# Allegro board BD9109FVMEVK-101_BRD_REV00_2013-11-22.brd
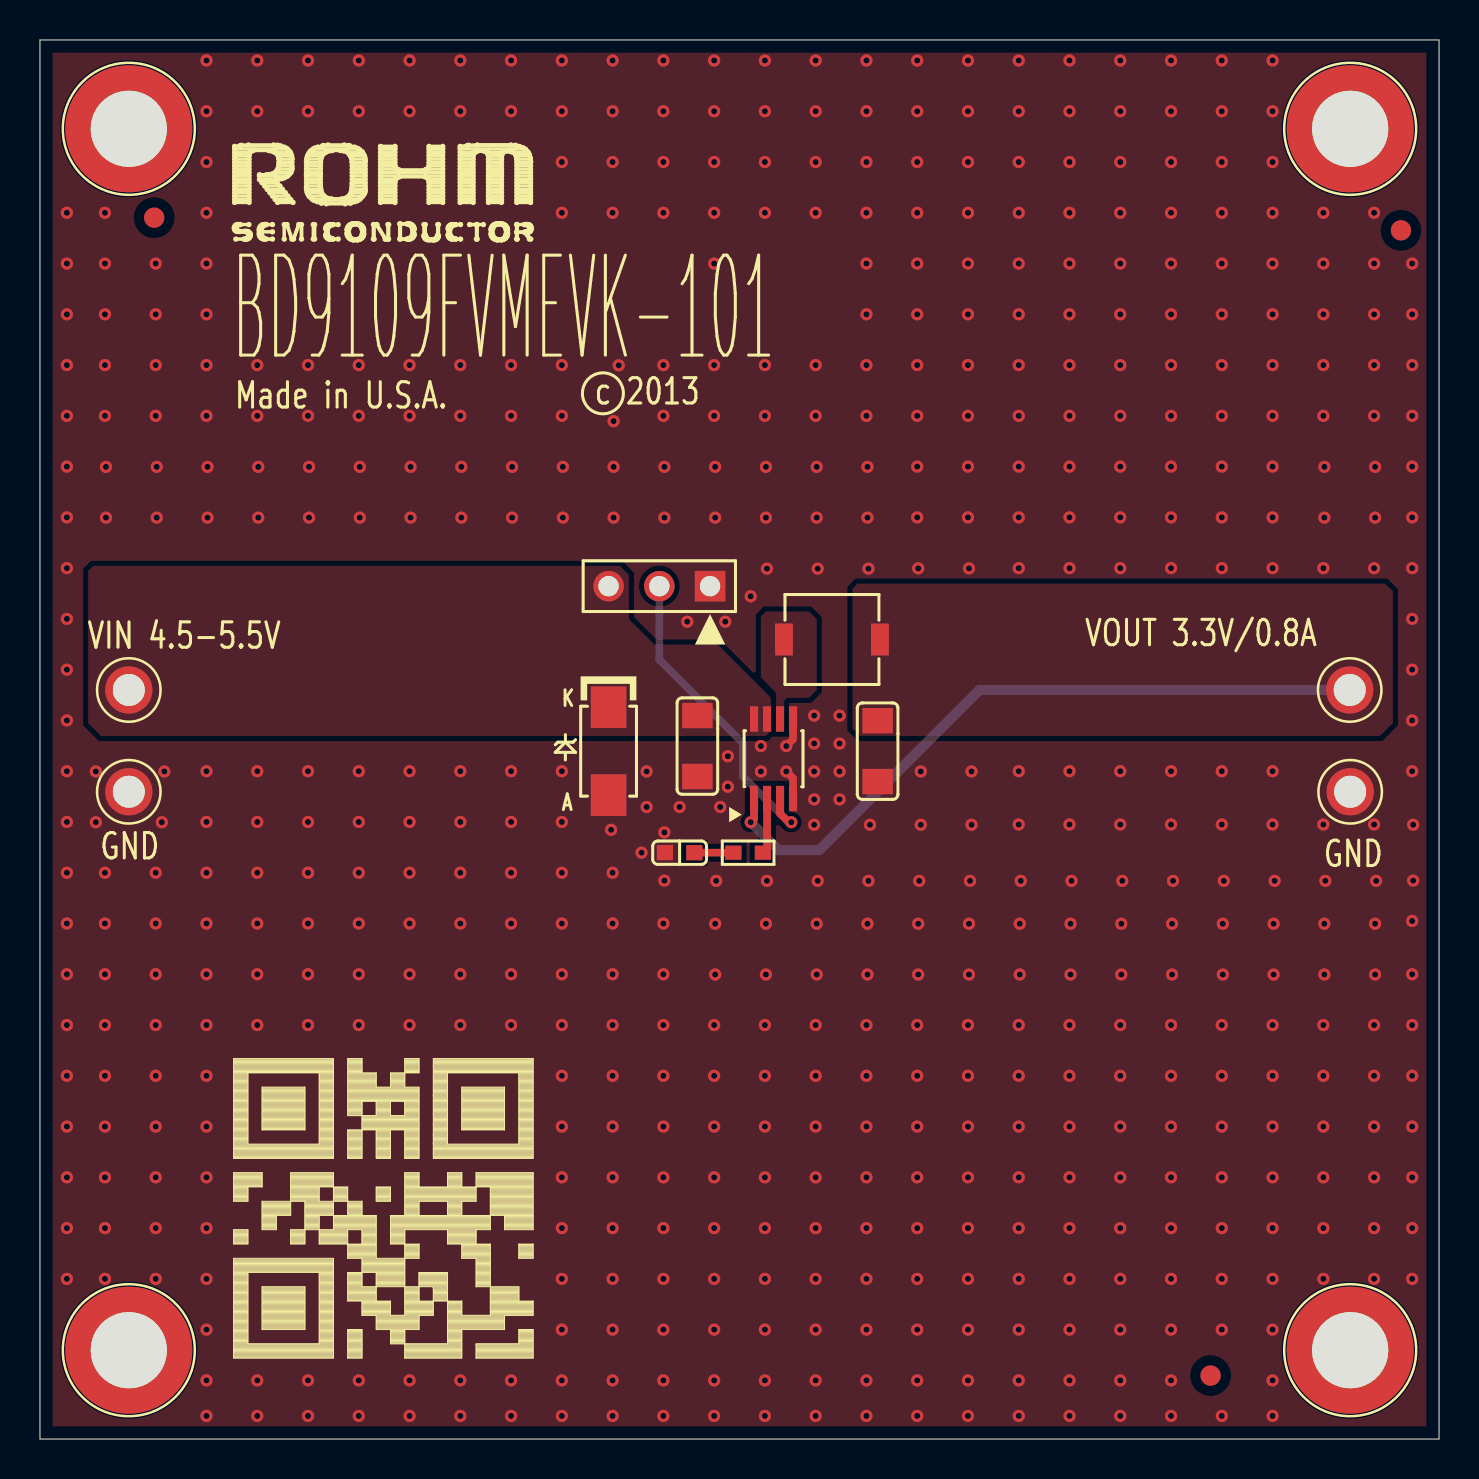
[diagram p0: board, top side]
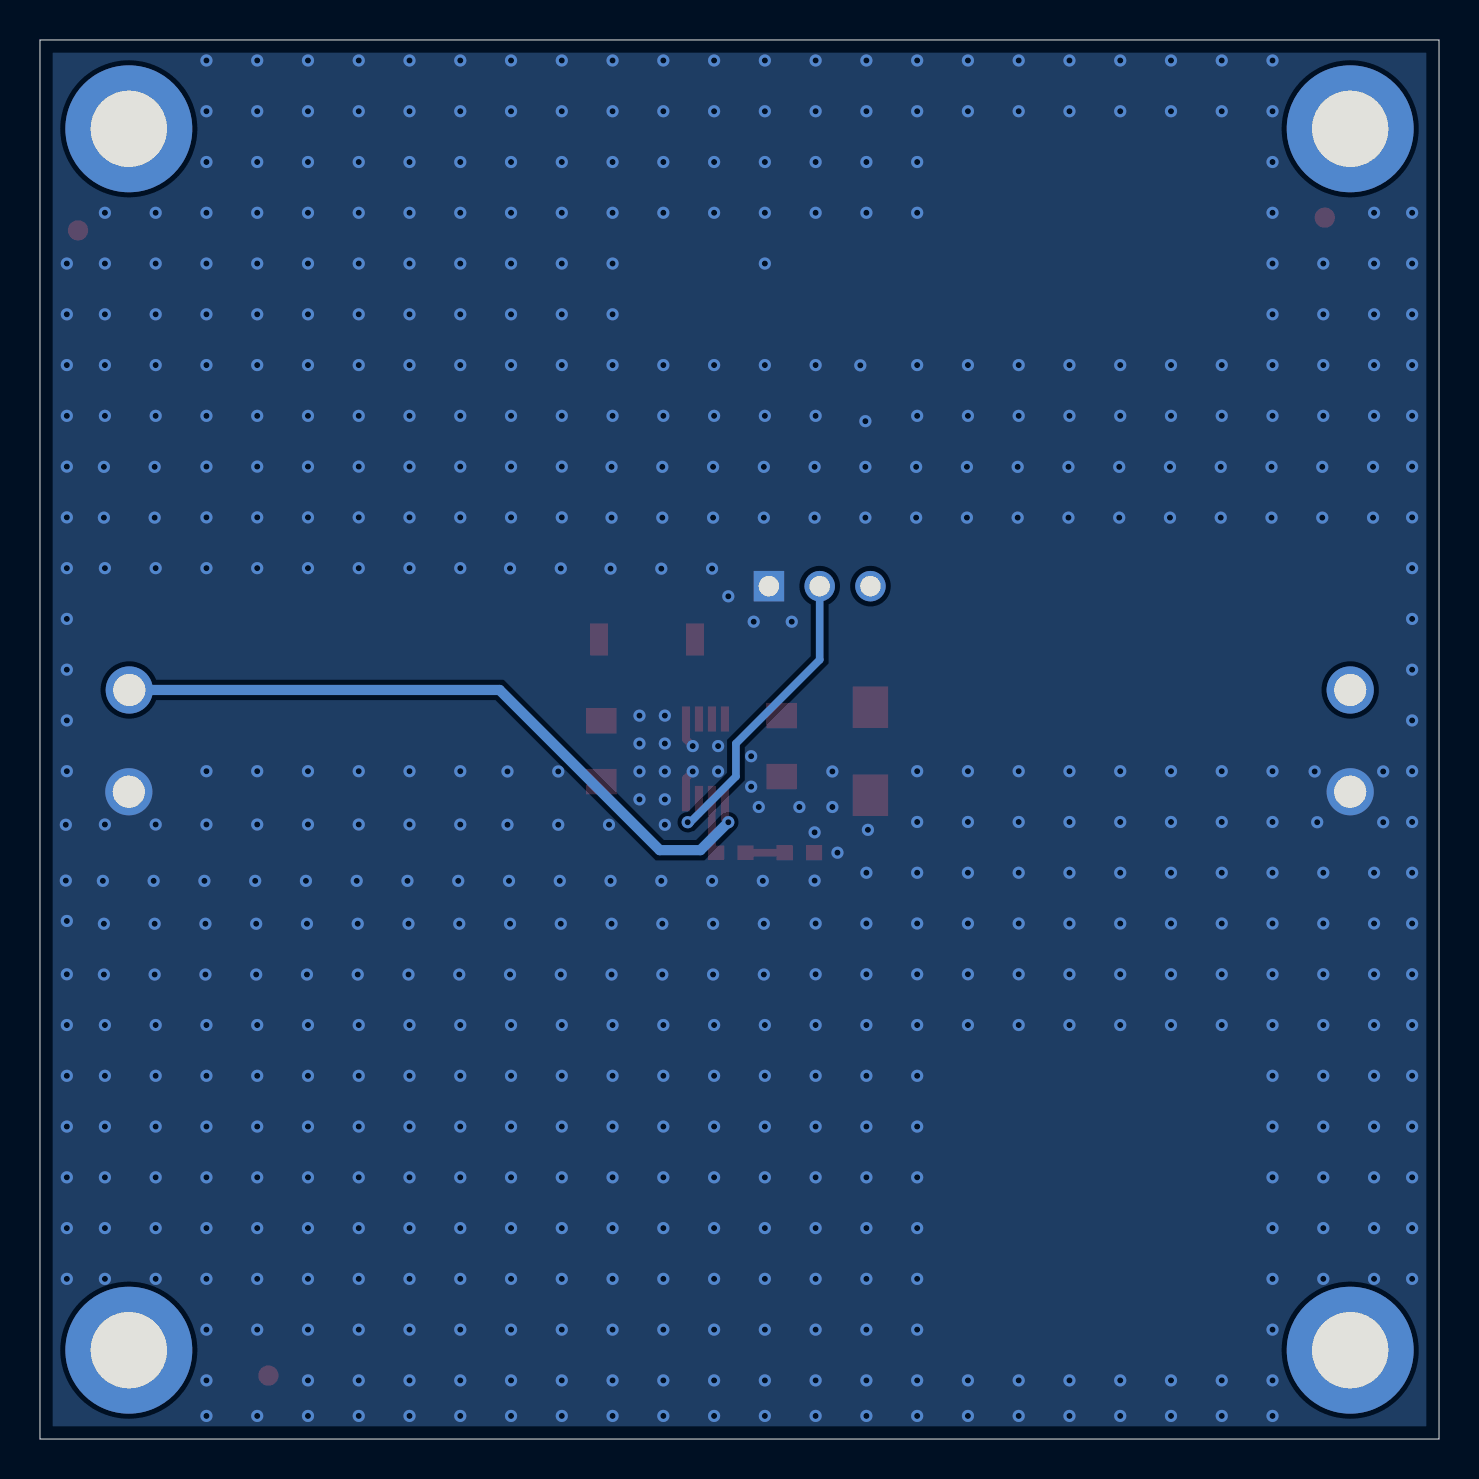
[diagram p1: board, bottom side, seen from below]

Outline 70 x 70 mm; copper layers: TOP, BOTTOM. Coordinates in mm from the lower left corner of the outline.
Outline path: 0,70 0,0 70,0 70,70 0,70

## Placement (name value [footprint] x y rotation side)
C1  10uF  [C1206]  41.91 34.42 270 top
C2  10uF  [C1206]  32.89 34.67 270 top
C3  330pF  [C0603]  32 29.34 0 top
D1  P4SMA6.8A  [DO-214AC]  28.45 34.42 270 top
J1  87224-3  [HDR_THVT_1X3_100]  33.53 42.67 180 top
L1  4.7uH  [SMT_4P5X4P7]  39.62 40.01 0 top
NOREF  -  []  0 0 0 top
NOREF#2  -  []  0 70 0 top
NOREF#3  -  []  70 0 0 top
NOREF#4  -  []  65.55 4.45 0 top
NOREF#5  -  [unnamed#2]  65.55 4.45 0 top
NOREF#6  -  [unnamed#2]  65.55 65.55 0 top
NOREF#7  -  [unnamed#3]  5.71 61.11 0 top
NOREF#8  -  []  4.45 4.45 0 top
NOREF#9  -  [unnamed#2]  4.45 65.55 0 top
NOREF#10  -  []  4.45 65.55 0 top
NOREF#11  -  []  -53.9 -127.88 0 top
NOREF#12  -  [unnamed#2]  4.45 4.45 0 top
NOREF#13  -  []  70 0 90 top
NOREF#14  -  [unnamed#3]  58.57 3.18 0 top
NOREF#15  -  []  4.45 4.45 0 top
NOREF#16  -  [unnamed#3]  68.09 60.47 0 top
NOREF#17  -  []  -12.15 -35.18 0 top
NOREF#18  -  []  0 70 0 top
NOREF#19  -  []  0 0 0 top
R1  30K  [R0603]  35.43 29.34 0 top
TP1  TP_63Mil_TH  [TP_TH]  65.53 37.48 270 top
TP2  TP_63Mil_TH  [TP_TH]  65.55 32.39 270 top
TP3  TP_63Mil_TH  [TP_TH]  4.45 37.48 0 top
TP4  TP_63Mil_TH  [TP_TH]  4.45 32.39 0 top
U1  BD9109FVM-TR  [MSOP8]  36.7 34.04 0 top

## Library data of the parts
C1 C2 = CAP_VER_CER_1210_10UF_16V_10%
C3 = CAP_VER_CER_0603_330PF_50V_10%
D1 = DIODE_TVS_5.8V_400W
J1 = CONN PCB 3x1_.100"
L1 = IND_SMT_4P5X4P7
R1 = R_VER_0805_30K_1/8W_1%
TP1-TP4 = TP_50Mil_TH
U1 = IC_BD9109FVM_MSOP8

## Footprints (pads in the part's own frame, mm; a bottom-side part is the same pattern mirrored in y, then rotated)
C0603
  rect 0.813x0.762 smd: 1(0.737,0) 2(-0.737,0)
C1206
  rect 1.27x1.524 smd: 1(-1.524,0) 2(1.524,0)
DO-214AC
  rect 2.083x1.778 smd: 1(-2.2,0) 2(2.2,0)
HDR_THVT_1X3_100
  rect 1.524x1.524 hole 1.016: 1(0,0)
  round 1.524 hole 1.016: 2(2.54,0) 3(5.08,0)
MSOP8
  rect 0.406x1.27 smd: 1(-0.975,-1.991) 2(-0.325,-1.991) 3(0.325,-1.991) 4(0.975,-1.991) 5(0.975,1.991) 6(0.325,1.991) 7(-0.325,1.991) 8(-0.975,1.991)
R0603
  rect 0.813x0.711 smd: 1(0.737,0) 2(-0.737,0)
SMT_4P5X4P7
  rect 0.889x1.6 smd: 1(-2.4,0) 2(2.4,0)
TP_TH
  round 2.362 hole 1.6: 1(0,0)
unnamed#2
  round 6.35 hole 3.81: (0,0)
unnamed#3
  round 1.016 smd: 1(0,0)

## Nets
GND: C1.2 C2.2 C3.2 D1.2(A) J1.1 TP2.1 TP4.1 U1.4(GND) U1.5(PGND)
VIN: C2.1 D1.1(C) J1.3 TP3.1 U1.7(PVCC) U1.8(VCC)
EN: J1.2 U1.3(EN)
ITH: R1.1 U1.2(ITH)
ITH_R: C3.1 R1.2
VOUT: C1.1 L1.2 TP1.1 U1.1(VOUT/ADJ)
N62520659: L1.1 U1.6(SW)

Pads without a net: NOREF#7 1; NOREF#14 1; NOREF#16 1

## Via types
v1: diameter 0.61, hole 0.305, TOP to BOTTOM, 597 vias

## Routing (per net, layer and track width the routed paths; a pad name or vN(x,y) marks a point on that pad's centre or on a via; arc(x,y) is an arc through that point)
GND: length 3
  TOP w0.381: U1.4 37.68,33.06 v1(37.34,33.4) ; U1.5 37.68,35.01 v1(37.34,34.67)
  vias: v1(1.35,61.35) v1(1.35,58.81) v1(1.35,56.27) v1(1.35,53.73) v1(1.35,51.19) v1(1.35,48.65) v1(1.35,46.11) v1(1.35,43.57) v1(1.35,41.03) v1(1.35,38.49) v1(1.35,35.95) v1(1.35,33.41) v1(1.35,30.87) v1(1.35,28.33) v1(1.35,25.79) v1(1.35,23.25) v1(1.35,20.71) v1(1.35,18.17) v1(1.35,15.63) v1(1.35,13.09) v1(1.35,10.55) v1(1.35,8.01) v1(2.79,33.4) v1(2.79,30.86) v1(3.25,61.35) v1(3.25,58.81) v1(3.25,56.27) v1(3.25,53.73) v1(3.25,51.19) v1(3.25,28.33) v1(3.25,25.79) v1(3.25,23.25) v1(3.25,20.71) v1(3.25,18.17) v1(3.25,15.63) v1(3.25,13.09) v1(3.25,10.55) v1(3.25,8.01) v1(3.3,48.64) v1(3.3,46.1) v1(5.79,58.81) v1(5.79,56.27) v1(5.79,53.73) v1(5.79,51.19) v1(5.79,28.33) v1(5.79,25.79) v1(5.79,23.25) v1(5.79,20.71) v1(5.79,18.17) v1(5.79,15.63) v1(5.79,13.09) v1(5.79,10.55) v1(5.79,8.01) v1(5.84,48.64) v1(5.84,46.1) v1(6.1,30.86) v1(6.22,33.4) v1(8.33,68.97) v1(8.33,66.43) v1(8.33,63.89) v1(8.33,61.35) v1(8.33,58.81) v1(8.33,56.27) v1(8.33,53.73) v1(8.33,51.19) v1(8.38,48.64) v1(8.38,46.1) v1(8.33,33.41) v1(8.33,30.87) v1(8.33,28.33) v1(8.33,25.79) v1(8.33,23.25) v1(8.33,20.71) v1(8.33,18.17) v1(8.33,15.63) v1(8.33,13.09) v1(8.33,10.55) v1(8.33,8.01) v1(8.33,5.47) v1(8.33,2.93) v1(8.33,1.16) v1(10.87,68.97) v1(10.87,66.43) v1(10.87,53.73) v1(10.87,51.19) v1(10.87,33.41) v1(10.87,30.87) v1(10.87,28.33) v1(10.87,25.79) v1(10.87,23.25) v1(10.87,20.71) v1(10.87,2.93) v1(10.87,1.16) v1(10.92,48.64) v1(10.92,46.1) v1(13.41,68.97) v1(13.41,66.43) v1(13.41,53.73) v1(13.41,51.19) v1(13.46,48.64) v1(13.46,46.1) v1(13.41,33.41) v1(13.41,30.87) v1(13.41,28.33) v1(13.41,25.79) v1(13.41,23.25) v1(13.41,20.71) v1(13.41,2.93) v1(13.41,1.16) v1(15.95,68.97) v1(15.95,66.43) v1(15.95,53.73) v1(15.95,51.19) v1(15.95,33.41) v1(15.95,30.87) v1(15.95,28.33) v1(15.95,25.79) v1(15.95,23.25) v1(15.95,20.71) v1(15.95,2.93) v1(15.95,1.16) v1(16,48.64) v1(16,46.1) v1(18.49,68.97) v1(18.49,66.43) v1(18.49,53.73) v1(18.49,51.19) v1(18.49,33.41) v1(18.49,30.87) v1(18.49,28.33) v1(18.49,25.79) v1(18.49,23.25) v1(18.49,20.71) v1(18.49,2.93) v1(18.49,1.16) v1(18.54,48.64) v1(18.54,46.1) v1(21.03,68.97) v1(21.03,66.43) v1(21.03,53.73) v1(21.03,51.19) v1(21.08,48.64) v1(21.08,46.1) v1(21.03,33.41) v1(21.03,30.87) v1(21.03,28.33) v1(21.03,25.79) v1(21.03,23.25) v1(21.03,20.71) v1(21.03,2.93) v1(21.03,1.16) v1(23.57,68.97) v1(23.57,66.43) v1(23.57,53.73) v1(23.57,51.19) v1(23.57,33.41) v1(23.57,30.87) v1(23.57,28.33) v1(23.57,25.79) v1(23.57,23.25) v1(23.57,20.71) v1(23.57,2.93) v1(23.57,1.16) v1(23.62,48.64) v1(23.62,46.1) v1(26.11,68.97) v1(26.11,66.43) v1(26.11,63.89) v1(26.11,61.35) v1(26.11,53.73) v1(26.11,51.19) v1(26.16,48.64) v1(26.16,46.1) v1(26.11,33.41) v1(26.11,30.87) v1(26.11,28.33) v1(26.11,25.79) v1(26.11,23.25) v1(26.11,20.71) v1(26.11,18.17) v1(26.11,15.63) v1(26.11,13.09) v1(26.11,10.55) v1(26.11,8.01) v1(26.11,5.47) v1(26.11,2.93) v1(26.11,1.16) v1(28.57,30.48) v1(28.65,68.97) v1(28.65,66.43) v1(28.65,63.89) v1(28.65,61.35) v1(28.65,28.33) v1(28.65,25.79) v1(28.65,23.25) v1(28.65,20.71) v1(28.65,18.17) v1(28.65,15.63) v1(28.65,13.09) v1(28.65,10.55) v1(28.65,8.01) v1(28.65,5.47) v1(28.65,2.93) v1(28.65,1.16) v1(28.7,50.93) v1(28.7,48.64) v1(28.7,46.1) v1(28.96,53.72) v1(30.1,29.34) v1(30.35,33.4) v1(30.35,31.62) v1(31.19,68.97) v1(31.19,66.43) v1(31.19,63.89) v1(31.19,61.35) v1(31.19,53.73) v1(31.19,51.19) v1(31.19,25.79) v1(31.19,23.25) v1(31.19,20.71) v1(31.19,18.17) v1(31.19,15.63) v1(31.19,13.09) v1(31.19,10.55) v1(31.19,8.01) v1(31.19,5.47) v1(31.19,2.93) v1(31.19,1.16) v1(31.24,48.64) v1(31.24,46.1) v1(31.24,30.35) v1(31.24,27.94) v1(32,31.62) v1(32.39,40.89) v1(33.73,68.97) v1(33.73,66.43) v1(33.73,63.89) v1(33.73,61.35) v1(33.73,58.81) v1(33.73,53.73) v1(33.73,51.19) v1(33.78,48.64) v1(33.78,46.1) v1(33.78,25.78) v1(33.78,23.24) v1(33.73,20.71) v1(33.73,18.17) v1(33.73,15.63) v1(33.73,13.09) v1(33.73,10.55) v1(33.73,8.01) v1(33.73,5.47) v1(33.73,2.93) v1(33.73,1.16) v1(33.83,27.93) v1(34.04,31.62) v1(34.29,40.89) v1(34.42,34.16) v1(34.42,32.64) v1(35.56,42.16) v1(36.07,34.67) v1(36.07,33.4) v1(36.27,68.97) v1(36.27,66.43) v1(36.27,63.89) v1(36.27,61.35) v1(36.27,53.73) v1(36.27,51.19) v1(36.27,20.71) v1(36.27,18.17) v1(36.27,15.63) v1(36.27,13.09) v1(36.27,10.55) v1(36.27,8.01) v1(36.27,5.47) v1(36.27,2.93) v1(36.27,1.16) v1(36.32,48.64) v1(36.32,46.1) v1(36.37,43.55) v1(36.37,27.93) v1(36.32,25.78) v1(36.32,23.24) v1(38.73,36.2) v1(38.73,34.8) v1(38.73,33.4) v1(38.73,32) v1(38.73,30.73) v1(38.81,68.97) v1(38.81,66.43) v1(38.81,63.89) v1(38.81,61.35) v1(38.81,53.73) v1(38.81,51.19) v1(38.86,48.64) v1(38.86,46.1) v1(38.86,25.78) v1(38.86,23.24) v1(38.81,20.71) v1(38.81,18.17) v1(38.81,15.63) v1(38.81,13.09) v1(38.81,10.55) v1(38.81,8.01) v1(38.81,5.47) v1(38.81,2.93) v1(38.81,1.16) v1(38.91,43.55) v1(38.91,27.93) v1(40.01,36.2) v1(40.01,34.8) v1(40.01,33.4) v1(40.01,32) v1(41.35,68.97) v1(41.35,66.43) v1(41.35,63.89) v1(41.35,61.35) v1(41.35,58.81) v1(41.35,56.27) v1(41.35,53.73) v1(41.35,51.19) v1(41.35,20.71) v1(41.35,18.17) v1(41.35,15.63) v1(41.35,13.09) v1(41.35,10.55) v1(41.35,8.01) v1(41.35,5.47) v1(41.35,2.93) v1(41.35,1.16) v1(41.4,48.64) v1(41.4,46.1) v1(41.45,43.55) v1(41.45,27.93) v1(41.4,25.78) v1(41.4,23.24) v1(41.53,30.73) v1(43.89,68.97) v1(43.89,66.43) v1(43.89,63.89) v1(43.89,61.35) v1(43.89,58.81) v1(43.89,56.27) v1(43.89,53.73) v1(43.89,51.19) v1(43.89,48.65) v1(43.89,46.11) v1(43.89,20.71) v1(43.89,18.17) v1(43.89,15.63) v1(43.89,13.09) v1(43.89,10.55) v1(43.89,8.01) v1(43.89,5.47) v1(43.89,2.93) v1(43.89,1.16) v1(43.94,43.56) v1(43.99,27.93) v1(43.94,25.78) v1(43.94,23.24) v1(44.07,33.4) v1(44.07,30.73) v1(46.43,68.97) v1(46.43,66.43) v1(46.43,63.89) v1(46.43,61.35) v1(46.43,58.81) v1(46.43,56.27) v1(46.43,53.73) v1(46.43,51.19) v1(46.43,48.65) v1(46.43,46.11) v1(46.48,43.56) v1(46.48,25.78) v1(46.48,23.24) v1(46.43,20.71) v1(46.43,18.17) v1(46.43,15.63) v1(46.43,13.09) v1(46.43,10.55) v1(46.43,8.01) v1(46.43,5.47) v1(46.43,2.93) v1(46.43,1.16) v1(46.53,27.93) v1(46.61,33.4) v1(46.61,30.73) v1(48.97,68.97) v1(48.97,66.43) v1(48.97,63.89) v1(48.97,61.35) v1(48.97,58.81) v1(48.97,56.27) v1(48.97,53.73) v1(48.97,51.19) v1(48.97,48.65) v1(48.97,46.11) v1(48.97,43.57) v1(48.97,33.41) v1(48.97,30.75) v1(48.97,20.71) v1(48.97,18.17) v1(48.97,15.63) v1(48.97,13.09) v1(48.97,10.55) v1(48.97,8.01) v1(48.97,5.47) v1(48.97,2.93) v1(48.97,1.16) v1(49.07,27.93) v1(49.02,25.78) v1(49.02,23.24) v1(51.51,68.97) v1(51.51,66.43) v1(51.51,63.89) v1(51.51,61.35) v1(51.51,58.81) v1(51.51,56.27) v1(51.51,53.73) v1(51.51,51.19) v1(51.51,48.65) v1(51.51,46.11) v1(51.51,43.57) v1(51.51,33.41) v1(51.51,30.75) v1(51.56,25.78) v1(51.56,23.24) v1(51.51,20.71) v1(51.51,18.17) v1(51.51,15.63) v1(51.51,13.09) v1(51.51,10.55) v1(51.51,8.01) v1(51.51,5.47) v1(51.51,2.93) v1(51.51,1.16) v1(51.61,27.93) v1(54.05,68.97) v1(54.05,66.43) v1(54.05,63.89) v1(54.05,61.35) v1(54.05,58.81) v1(54.05,56.27) v1(54.05,53.73) v1(54.05,51.19) v1(54.05,48.65) v1(54.05,46.11) v1(54.05,43.57) v1(54.05,33.41) v1(54.05,30.75) v1(54.05,20.71) v1(54.05,18.17) v1(54.05,15.63) v1(54.05,13.09) v1(54.05,10.55) v1(54.05,8.01) v1(54.05,5.47) v1(54.05,2.93) v1(54.05,1.16) v1(54.15,27.93) v1(54.1,25.78) v1(54.1,23.24) v1(56.59,68.97) v1(56.59,66.43) v1(56.59,63.89) v1(56.59,61.35) v1(56.59,58.81) v1(56.59,56.27) v1(56.59,53.73) v1(56.59,51.19) v1(56.59,48.65) v1(56.59,46.11) v1(56.59,43.57) v1(56.59,33.41) v1(56.59,30.75) v1(56.59,20.71) v1(56.59,18.17) v1(56.59,15.63) v1(56.59,13.09) v1(56.59,10.55) v1(56.59,8.01) v1(56.59,5.47) v1(56.59,2.93) v1(56.59,1.16) v1(56.69,27.93) v1(56.64,25.78) v1(56.64,23.24) v1(59.13,68.97) v1(59.13,66.43) v1(59.13,63.89) v1(59.13,61.35) v1(59.13,58.81) v1(59.13,56.27) v1(59.13,53.73) v1(59.13,51.19) v1(59.13,48.65) v1(59.13,46.11) v1(59.13,43.57) v1(59.13,33.41) v1(59.13,30.75) v1(59.18,25.78) v1(59.18,23.24) v1(59.13,20.71) v1(59.13,18.17) v1(59.13,15.63) v1(59.13,13.09) v1(59.13,10.55) v1(59.13,8.01) v1(59.13,5.47) v1(59.13,1.16) v1(59.23,27.93) v1(61.67,68.97) v1(61.67,66.43) v1(61.67,63.89) v1(61.67,61.35) v1(61.67,58.81) v1(61.67,56.27) v1(61.67,53.73) v1(61.67,51.19) v1(61.67,48.65) v1(61.67,46.11) v1(61.67,43.57) v1(61.67,33.41) v1(61.67,30.75) v1(61.67,20.71) v1(61.67,18.17) v1(61.67,15.63) v1(61.67,13.09) v1(61.67,10.55) v1(61.67,8.01) v1(61.67,5.47) v1(61.67,2.93) v1(61.67,1.16) v1(61.77,27.93) v1(61.72,25.78) v1(61.72,23.24) v1(64.21,61.35) v1(64.21,58.81) v1(64.21,56.27) v1(64.21,53.73) v1(64.21,51.19) v1(64.26,48.64) v1(64.26,46.1) v1(64.21,43.57) v1(64.21,30.75) v1(64.26,25.78) v1(64.26,23.24) v1(64.21,20.71) v1(64.21,18.17) v1(64.21,15.63) v1(64.21,13.09) v1(64.21,10.55) v1(64.21,8.01) v1(64.31,27.93) v1(66.75,61.35) v1(66.75,58.81) v1(66.75,56.27) v1(66.75,53.73) v1(66.75,51.19) v1(66.75,43.57) v1(66.75,30.75) v1(66.75,20.71) v1(66.75,18.17) v1(66.75,15.63) v1(66.75,13.09) v1(66.75,10.55) v1(66.75,8.01) v1(66.8,48.64) v1(66.8,46.1) v1(66.85,27.93) v1(66.8,25.78) v1(66.8,23.24) v1(68.66,58.81) v1(68.66,56.27) v1(68.66,53.73) v1(68.66,51.19) v1(68.66,48.65) v1(68.66,46.11) v1(68.66,43.57) v1(68.66,41.03) v1(68.66,38.49) v1(68.66,35.95) v1(68.66,33.41) v1(68.66,25.92) v1(68.66,23.25) v1(68.66,20.71) v1(68.66,18.17) v1(68.66,15.63) v1(68.66,13.09) v1(68.66,10.55) v1(68.66,8.01) v1(68.71,30.73) v1(68.71,27.94)
EN: length 16.1
  TOP w0.381: v1(37.59,30.86) 37.47,30.86 37.03,31.3 U1.3
  BOTTOM w0.381: J1.2 30.99,38.99 35.18,34.8 35.18,33.15 37.47,30.86 v1(37.59,30.86)
ITH: length 2.8
  TOP w0.381: U1.2 36.38,29.55 R1.1
ITH_R: length 2
  TOP w0.381: R1.2 C3.1
VOUT: length 35.1
  TOP w0.381: U1.1 35.73,32.04 35.73,31.03 v1(35.56,30.86)
  BOTTOM w0.508: v1(35.56,30.86) 36.96,29.46 38.99,29.46 47,37.48 TP1.1

## Copper pours and planes (outline as drawn; the poured copper is in the pictures)
GND on TOP: 0.64,0.64 0.64,69.36 69.36,69.36 69.36,0.64
GND on BOTTOM: 0.64,69.36 69.36,69.36 69.36,0.64 0.64,0.64
VIN on TOP: 36.57,35.42 36.32,35.18 3.05,35.18 2.41,35.81 2.41,43.43 2.67,43.69 29.02,43.69 29.46,43.24 29.46,41.02 30.73,39.75 33.91,39.75 36.57,37.09
VOUT on TOP: 40.65,35.55 40.65,42.55 40.91,42.8 67.31,42.8 67.69,42.42 67.69,35.81 67.06,35.18 41.02,35.18
N62520659 on TOP: 36.84,35.43 36.84,37.33 36.07,38.1 36.07,41.15 36.32,41.4 38.48,41.4 38.86,41.02 38.86,37.47 38.48,37.08 37.39,37.08 37.21,36.91 37.21,35.43

## Text on the board
Ref Des/Silkscreen Top: VIN 4.5-5.5V | GND | Made in U.S.A. | c 2013 | VOUT 3.3V/0.8A | BD9109FVMEVK-101
User.17: 14. Rounding is allowed on 90 degree corners with the size of | 12. Inside corners should be rounded-off | 13. Changes to board geometries and apertures are not | 10. Bow and Twist | 11. Inspection | standard routing bit. | allowed unless they are approved by customer. | 4. Drilling | 5. Finish | 9. Packaging | 8. Cleanliness | 7. Electrical Test | 3. Soldermask | photoimageable soldermask, 003 max. thickness. | Soldermask over bare copper. | Soldermask is allowed in via holes. | Bow and twist to be .007 IN/IN or .090 max according to IPC-A-600D. | NOTES: | 2. Material | 6. Silkscreen | to conduct a thorough review of the artwork and media for | writing (in advance of manufacturing) of any changes, revisions,or | 1. Specifications. | as meaxured by the omega meter 600SMD. | A. All hole diameters are finished sizes. | B. All hole to be +/- .003 from true position unless otherwise specified. | C. All hole diameters to be +/- .003 unless otherwise specified. | D. An NC drill file has been supplied - see drill table. | A. Plate thru with copper .0010 min to .002 max. thickness drill size | dimension apply after plating. | B. Use gold immersion over nickel. | C. Finished boards shall not have nicks, | scratches, voids, exposed copper, poor plating, all misdrilled holes. | manufacturability in the supplier's process compliance to all | A. Boards shall be free of fiber glass dust or any other foreign material. | B. Finished boards must conform to 0.01 MG/IN max NAcL ionic contamination | A. All boards shall be 100% electrically tested for opens/short at 10 volts. | MIL-SPEC boards to be tested at 40 volts. | B. Apply test stamp in non-legend area on solder side of PCB. | C. Test is required on both sides of the board. | Solder mask both sides with (green color) liquid | A. FR406. | B. Color to be opaque. | A. Silkscreen using white non-conductive epoxy or equivalent (both sides). | B. No silkscreen allowed on exposed lands. | C. Silkscreen must be a minimum of 3mm away form fiducial marks. | D. Minimum clearance between silkscreen legend and vias, pads, or holes | to be .005. | E. Silkscreen is allowed in via holes. | There shall be a max of 25 units per package, individually wrapped, | and shipped in cardboard cratons with sufficient surrounding | material to prevend shipping damage. | A.Automatic optical inspection of all layers required. | B.The impedance should be controlled by stackup layer. | gerber and drill data when applicable. | A. Fabricate IAW  IPC600, latest revision. | B. Producibility study - It is the respondsibility  of the supplier | corrections made or recommendations to ensure conformance to | D. This drawing is to be used in conjunction with the provided | E. All notes are "Unless Otherwise Specified." | standards, and of  any specifications that  cannot be met. | applicable specifications. Customer must be advised in
User.27: L2_GND
User.28: L3_PWR
User.29: 1 | 2 | L | TOTAL 62 MILs +/-10% thickness board | a | - | y | e | r | s | T | ( | . | m | h | C | 4 | i | 0 | c | u | l | k | ) | D | P | w | 2 oz | t | H | F | o | z | p | V
User.32: FIGURE | SIZE | 12.0 | 40.0 | 63.0 | 150.0 | DRILL CHART: TOP to BOTTOM | ALL UNITS ARE IN MILS | TOLERANCE | +3.0/-10.0 | +3.0/-3.0 | PLATED | QTY | 597 | 3 | 4
